# Altium PCB LFO PCB 2.PcbDoc
Units mm, origin at the board's own origin, x right, y up, seen from the top; angles counter-clockwise.
Board outline 128.52 x 37.97 mm, 2 copper layers (Top Layer, Bottom Layer); 37 components, 26 nets, 117 pads, 28 vias.
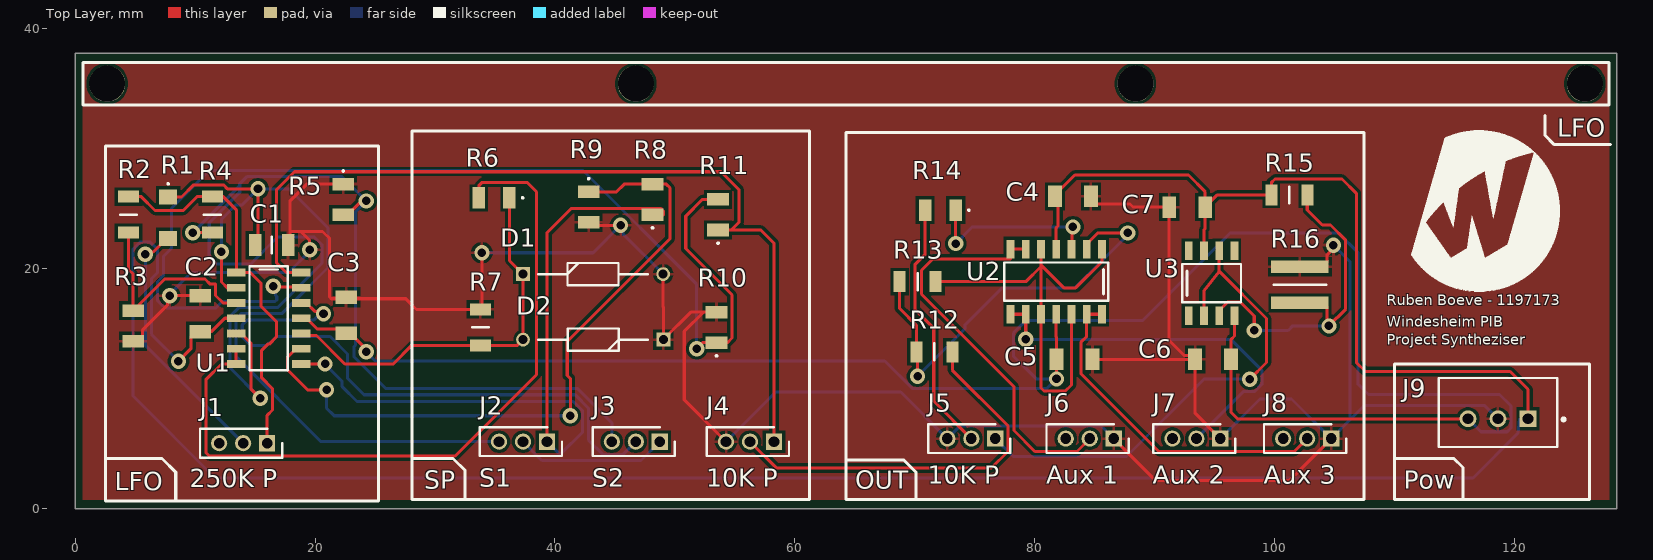
[diagram p0: Top Layer view]
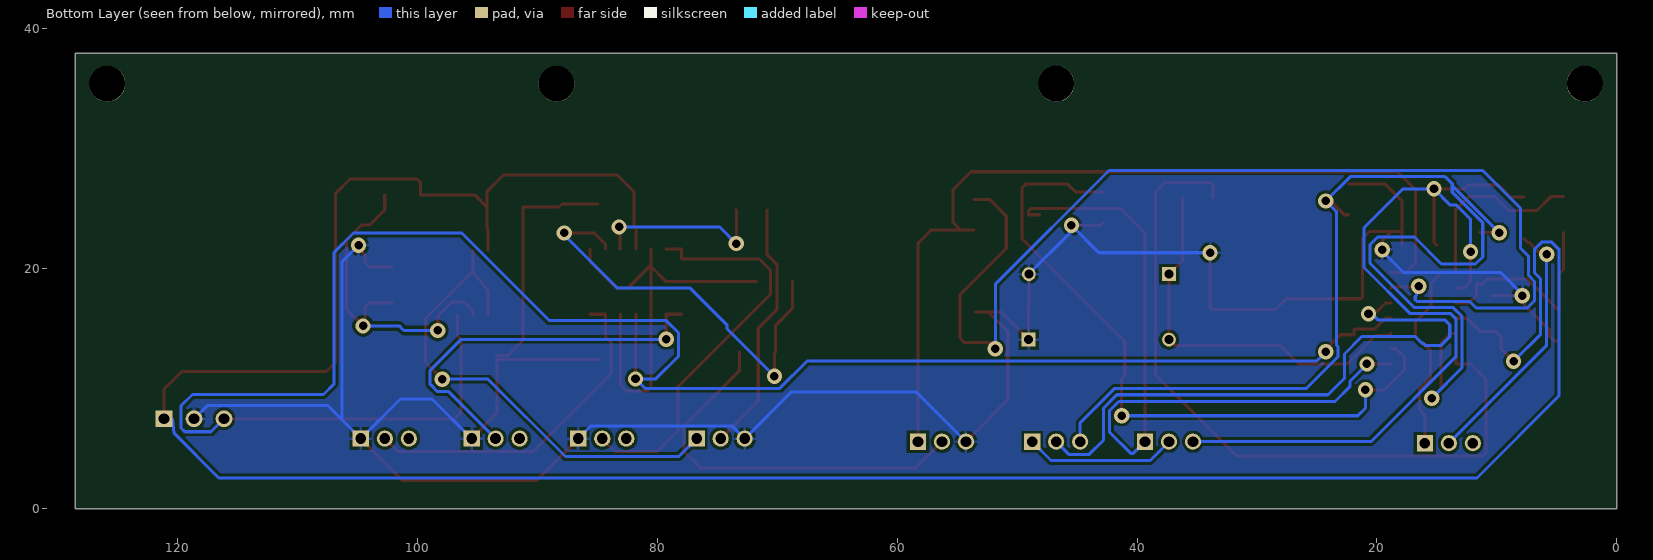
[diagram p1: Bottom Layer view, seen from below]

## Layer stack, top to bottom
Top Solder: solder mask 0.0102, Solder Resist, Dk 3.5
Top Layer: signal copper 0.0356
Dielectric 1: dielectric 0.32, FR-4, Dk 4.8
Bottom Layer: signal copper 0.0356
Bottom Solder: solder mask 0.0102, Solder Resist, Dk 3.5

## Board outline
0,0 0,37.973 128.524,37.973 128.524,0

## Design rules (kind name [scope] priority, off if disabled: settings)
Clearance "polygon to board clearance" [InPolygon vs OnLayer('Mechanical 1')] p1: gap=0.305 ignorepadtopadclearanceinfootprint=TRUE
Clearance Clearance_1 [All] p2: gap=0.254 ignorepadtopadclearanceinfootprint=TRUE
PolygonConnect [All] p1: connectstyle=Relief reliefconductorwidth=0.254 reliefentries=4 polygonreliefangle="90 Angle" airgapwidth=0.254
RoutingVias [All] p1: holewidth=0.711 width=1.27 viastyle="Through Hole" minholewidth=0.711 minwidth=1.27 maxholewidth=0.711 maxwidth=1.27
SolderMaskExpansion [All] p1: expansion=0.102 istentingtop=FALSE
SupplyNets "Schematic Supply Nets_3" [InNet('VCC')] p1: voltage=0.000
SupplyNets "Schematic Supply Nets_2" [InNet('-VCC')] p2: voltage=0.000
SupplyNets "Schematic Supply Nets_1" [InNet('GND')] p3: voltage=0.000
SupplyNets "Schematic Supply Nets" [InNet('+1.5V')] p4: voltage=0.000
Width [All] p1: maxlimit=0.254 minlimit=0.254 preferedwidth=0.254
30 further rules are at their usual default settings.

## Components (designator, comment, footprint, x,y, rotation, side; value= is the part's Value field where it differs from the comment)
C1 "4.7uF" CAPC3216X180N 16.383,21.971 r180 top
C2 "0.1uF" C1206 10.414,16.256 r90 top
C3 "0.1uF" C1206 22.606,16.129 r90 top
C4 "0.1uF" C1206 83.185,26.035 r0 top
C5 "0.1uF" C1206 83.312,12.446 r0 top
C6 "0.1uF" C1206 94.869,12.446 r180 top
C7 "0.1uF" C1206 92.71,25.146 r0 top
D1 "1N4148,133" DIOAD1165W56L425D185 37.321,19.558 r0 top
D2 "1N4148,133" DIOAD1165W56L425D185 49.038,14.097 r180 top
J1 "250K P" SHDR3W50P0X200_1X3_650X240X440P 16.002,5.461 r180 top
J2 "S1" SHDR3W50P0X200_1X3_650X240X440P 39.338,5.588 r180 top
J3 "S2" SHDR3W50P0X200_1X3_650X240X440P 48.736,5.588 r180 top
J4 "10K P" SHDR3W50P0X200_1X3_650X240X440P 58.261,5.588 r180 top
J5 "10K P" SHDR3W50P0X200_1X3_650X240X440P 76.708,5.842 r180 top
J6 "Aux 1" SHDR3W50P0X200_1X3_650X240X440P 86.582,5.842 r180 top
J7 "Aux 2" SHDR3W50P0X200_1X3_650X240X440P 95.472,5.842 r180 top
J8 "Aux 3" SHDR3W50P0X200_1X3_650X240X440P 104.711,5.842 r180 top
J9 "B3B-XH-A(LF)(SN)" FP-B3B-XH-A_LF_SN-MFG 118.618,8.018 r180 top
R1 "1.1K" ERJS08_U08_(1206) 7.747,24.257 r270 top
R2 "10K" RESC3116X65N 4.445,24.511 r90 top
R3 "1K" RCC1206_e3 4.826,15.24 r90 top
R4 "10K" RESC3116X65N 11.43,24.511 r270 top
R5 "1K" RCC1206_e3 22.352,25.781 r270 top
R6 "1K" RCC1206_e3 34.925,25.908 r180 top
R7 "10K" RESC3116X65N 33.782,15.113 r270 top
R8 "1K" RCC1206_e3 48.133,25.781 r90 top
R9 "1K" RCC1206_e3 42.799,25.146 r270 top
R10 "1K" RCC1206_e3 53.467,15.113 r90 top
R11 "1K" RCC1206_e3 53.594,24.511 r90 top
R12 "10K" RESC3116X65N 71.628,13.081 r180 top
R13 "10K" RESC3116X65N 70.231,18.923 r0 top
R14 "1K" RCC1206_e3 72.136,24.892 r180 top
R15 "10K" RESC3116X65N 101.219,26.162 r180 top
R16 "1.5K" RESC3246X60N 102.108,18.669 r270 top
U1 "LM324N" SOIC127P600X175-14N 16.129,15.875 r0 top
U2 "LM324N" SOIC127P600X175-14N 81.788,18.923 r270 top
U3 "UA741CD" SOIC127P600X175-8N 94.742,18.796 r90 top

## Footprints (in the part's own frame and the unit in brackets; to place one, negate y for a bottom-side part, rotate by r counter-clockwise, add the part's x,y. Pads: shape width x height; smd on the part's side, far side on the other; paste and mask are expansions set on the pad)
C1206 [mm]
  rect 1.15x1.8 smd: 1(-1.5,0) 2(1.5,0)
  body extent -1.7,-0.9 1.7,0.9, height 1.75
CAPC3216X180N [mm]
  rect 1.07x1.82 smd: 1(-1.38,0) 2(1.38,0)
  silkscreen extent 0,-0.7 0,0.7, body extent -1.6,-0.8 1.6,0.8, height 1.8
DIOAD1165W56L425D185 [mm]
  rect 1.15x1.15 hole 0.75: 1(0,0)
  round 1.15 hole 0.75: 2(11.7,0)
  silkscreen extent 1.29,-0.93 10.43,0.93, body extent 0.96,1.69 2.67,3.39, height 32.04
ERJS08_U08_(1206) [mm]
  rect 1.25x1.5 smd: 1(-1.725,0) 2(1.725,0)
  silkscreen extent -2.87,-0.05 -2.78,0.05, body extent -1.6,-0.8 1.6,0.8, height 0.6
FP-B3B-XH-A_LF_SN-MFG [mm]
  rect 1.4x1.4 hole 0.9 paste-2539.97 mask+0: 1(-2.5,0.525)
  round 1.4 hole 0.9 paste-2539.97 mask+0: 2(0,0.525) 3(2.5,0.525)
  silkscreen extent -5.6,-2.88 4.95,2.87, body extent -5.05,-2.98 5.05,2.98, height 0.25
RCC1206_e3 [mm]
  rect 1.05x1.8 smd: 1(-1.275,0) 2(1.275,0)
  body extent -1.6,-0.8 1.6,0.8, height 0.55
RESC3116X65N [mm]
  rect 1x1.75 smd: 1(-1.5,0) 2(1.5,0)
  silkscreen extent 0,-0.7 0,0.7, body extent -1.55,-0.8 1.55,0.8, height 0.65
RESC3246X60N [mm]
  rect 1.05x4.8 smd: 1(-1.5,0) 2(1.5,0)
  silkscreen extent 0,-2.2 0,2.2, body extent -1.58,-2.3 1.58,2.3, height 0.6
SHDR3W50P0X200_1X3_650X240X440P [mm]
  rect 1.35x1.35 hole 0.9: 1(0,0)
  round 1.35 hole 0.9: 2(2,0) 3(4,0)
  silkscreen extent -1.25,-1.2 5.6,1.2, body extent -1.25,-1.2 5.25,1.2, height 4.4
SOIC127P600X175-8N [mm]
  rect 1.525x0.65 smd: 1(-2.712,1.905) 2(-2.712,0.635) 3(-2.712,-0.635) 4(-2.712,-1.905) 5(2.712,-1.905) 6(2.712,-0.635) 7(2.712,0.635) 8(2.712,1.905)
  silkscreen extent -1.6,-2.45 1.6,2.45, body extent -3,-2.45 3,2.45, height 1.75
SOIC127P600X175-14N [mm]
  rect 1.525x0.65 smd: 1(-2.712,3.81) 2(-2.712,2.54) 3(-2.712,1.27) 4(-2.712,0) 5(-2.712,-1.27) 6(-2.712,-2.54) 7(-2.712,-3.81) 8(2.712,-3.81) 9(2.712,-2.54) 10(2.712,-1.27) 11(2.712,0) 12(2.712,1.27) 13(2.712,2.54) 14(2.712,3.81)
  silkscreen extent -1.6,-4.33 1.6,4.33, body extent -3.01,-4.32 3.01,4.34, height 1.75

## Part data
C1: library part KGM31AR71H475KU, "Capacitor", Manufacturer_Name="Kyocera AVX", Mouser Part Number=581-KGM31AR71H475KU, Arrow Part Number=KGM31AR71H475KU, Arrow Price/Stock=https://www.arrow.com/en/products/kgm31ar71h475ku/avx?region=europe, Datasheet Link=https://eu.mouser.com/datasheet/2/40/KGM_X7R-3223212.pdf, Height=1.8mm, Manufacturer_Part_Number=KGM31AR71H475KU, Mouser Price/Stock=https://www.mouser.co.uk/ProductDetail/KYOCERA-AVX/KGM31AR71H475KU?qs=9vOqFld9vZWqrEB01UnVcA%3D%3D
C2 C3 C4 C5 C6 C7: library part C1206F104M4RACTU, "Capacitor", Manufacturer_Name=KEMET, Mouser Part Number=80-C1206F104M4R, Datasheet Link=https://content.kemet.com/datasheets/KEM_C1012_X7R_OPENMODE_SMD.pdf, Manufacturer_Part_Number=C1206F104M4RACTU, Mouser Price/Stock=https://www.mouser.com/Search/Refine.aspx?Keyword=80-C1206F104M4R
D1 D2: "Diode", Manufacturer_Name=Nexperia, Mouser Part Number=771-1N4148,133, Arrow Part Number=1N4148,133, Arrow Price/Stock=https://www.arrow.com/en/products/1n4148133/nxp-semiconductors, Datasheet Link=https://assets.nexperia.com/documents/data-sheet/1N4148_1N4448.pdf, Manufacturer_Part_Number=1N4148,133, Mouser Price/Stock=https://www.mouser.co.uk/ProductDetail/Nexperia/1N4148133?qs=elmhQ6eFu7hy8ApvpFxPZg%3D%3D
J1 J2 J3 J4 J5 J6 J7 J8: library part M22-7130342, "Connector", Manufacturer_Name=Harwin, Mouser Part Number=855-M22-7130342, Datasheet Link=https://cdn.harwin.com/pdfs/M22-713.pdf, Height=4.4mm, Manufacturer_Part_Number=M22-7130342, Mouser Price/Stock=https://www.mouser.co.uk/ProductDetail/Harwin/M22-7130342?qs=ulE8k0yEMYayWQDoDALDQw%3D%3D
J9: library part CMP-17439-000014-3, "CONN HEADER VERT 3POS 2.5MM", Color=Natural, Contact Resistance=20mR, Current Rating=3A, Flammability Rating="UL94 V-0", Housing Color=White, Insulation Resistance=1GR, Max Operating Temperature=85°C, Max Voltage Rating (AC)=250V, Min Operating Temperature=-25°C, Connector Type=Header, Contact Finish - Mating=TIN, Contact Material=Brass, Contact Plating=Tin, Contact Shape=Square, Contact Type="Male Pin", Depth=5.75mm, Fastening Type=Detent, Gender=Male, Housing Material=Polyamide, Insulation Color=Natural, Insulation Material=Nylon, Lead Free="Lead Free", Lead Pitch=2.5mm, Length=9.9mm, Max Current Rating=3A, Max Voltage Rating (DC)=250V, Mount="Through Hole", Number of Contacts=3, Number of Positions=3, Number of Rows=1, Orientation=Straight, Packaging=Bulk, Pitch=2.5mm, REACH SVHC="No SVHC", Series=XH, Termination=Solder, Voltage Rating=250V, Voltage Rating (AC)=250V, Wire/Cable Gauge=22AWG
R1: library part ERJ-S08F1101V, "Resistor", Manufacturer_Name=Panasonic, Datasheet Link=http://industrial.panasonic.com/cdbs/www-data/pdf/RDP0000/AOA0000C334.pdf, Height=0.7mm, Manufacturer_Part_Number=ERJ-S08F1101V
R2 R4 R7 R12 R13 R15: library part RC1206FR-0710KL, "Resistor 1206", Manufacturer_Name=YAGEO, Mouser Part Number=603-RC1206FR-0710KL, Arrow Part Number=RC1206FR-0710KL, Arrow Price/Stock=https://www.arrow.com/en/products/rc1206fr-0710kl/yageo?region=europe, Datasheet Link=https://www.yageo.com/upload/media/product/app/datasheet/rchip/pyu-rc_group_51_rohs_l.pdf, Height=0.65mm, Manufacturer_Part_Number=RC1206FR-0710KL, Mouser Price/Stock=https://www.mouser.co.uk/ProductDetail/YAGEO/RC1206FR-0710KL?qs=%252BhB4WxZmbVEJV82xdVgRUw%3D%3D
R3 R5 R6 R8 R9 R10 R11 R14: library part RCC12061K00FKEA, "Resistor", Manufacturer_Name=Vishay, Mouser Part Number=71-RCC12061K00FKEA, Arrow Part Number=RCC12061K00FKEA, Arrow Price/Stock=https://www.arrow.com/en/products/rcc12061k00fkea/vishay?utm_currency=USD&region=nac, Datasheet Link=https://www.vishay.com/docs/20066/rcce3.pdf, Height=0.6mm, Manufacturer_Part_Number=RCC12061K00FKEA, Mouser Price/Stock=https://www.mouser.co.uk/ProductDetail/Vishay-Dale/RCC12061K00FKEA?qs=IS%252B4QmGtzzoI2b9zl4DztQ%3D%3D
R16: library part CRCW12181K50JNEK, "Resistor", Manufacturer_Name=Vishay, Datasheet Link=https://www.vishay.com/docs/20035/dcrcwe3.pdf, Height=0.6mm, Manufacturer_Part_Number=CRCW12181K50JNEK
U1 U2: "Quad Op-Amp", Manufacturer_Name="Texas Instruments", Manufacturer_Part_Number=LM324M/NOPB, Mouser Part Number=926-LM324M/NOPB, ComponentLink1Description="New link", ComponentLink1URL=http://www.ti.com/lit/ds/symlink/lm324-n.pdf, Height=1.75mm
U3: "Integrated Circuit", Manufacturer_Name="Texas Instruments", Mouser Part Number=595-UA741CD, Arrow Part Number=UA741CD, Arrow Price/Stock=https://www.arrow.com/en/products/ua741cd/texas-instruments?utm_currency=USD&region=nac, Datasheet Link=http://www.ti.com/lit/ds/symlink/ua741.pdf, Height=1.75mm, Manufacturer_Part_Number=UA741CD, Mouser Price/Stock=https://www.mouser.co.uk/ProductDetail/Texas-Instruments/UA741CD?qs=WzgTT80quPFAtpKavrxmtQ%3D%3D

## Free pads (board coordinates)
  round 3 hole 3: 2(2.667,35.433) 3(125.857,35.433) 4(88.392,35.433) 5(46.736,35.433)

## Via types
v1: diameter 1.27, hole 0.711, Top Layer to Bottom Layer, 28 vias

## Nets (pads, with @x,y where several pads share a name; then routed paths per layer and width w, separated by ;. In a path a pad name is that pad's centre, name@x,y a point inside that pad or via, vN(x,y) a via of type N, cw(c..) or ccw(c..) an arc to the next point about the centre after c; other vN are vias at no path point)
+1.5V: J5.1 U3.2 U3.6 | length 41.6
  Top Layer w0.254: U3.2 94.107,18.161 95.377,19.787 ; U3.6 95.377,19.787 ; v1(97.917,10.795) 99.314,12.192 99.314,15.85 95.377,19.787
  Bottom Layer w0.254: J5.1 78.207,4.343 87.655,4.343 94.107,10.795 v1(97.917,10.795)
-VCC: C3.1 C5.1 C6.1 J9.3 U1.11 U2.11 U3.4 | length 169
  Top Layer w0.254: U1.11 19.279,15.875 20.168,14.986 21.833,14.986 21.9,14.919 C3.1@21.9,14.502 ; C3.1@22.154,14.502 23.058,14.502 24.257,13.303 v1(24.257,13.081) ; U2.11 81.788,14.324 81.812,14.3 C5.1 v1(81.812,10.82) ; U3.4 96.647,14.4 96.369,14.122 C6.1 96.369,8.025 96.901,7.493 J9.3
  Bottom Layer w0.254: v1(24.257,13.081) 25.019,12.319 67.488,12.319 69.774,10.033 81.025,10.033 v1(81.812,10.82) 80.112,10.82 78.232,12.7 78.232,14.656 79.248,15.672 88.976,15.672 96.291,22.987 105.323,22.987 106.934,21.376 106.934,10.414 107.823,9.525 118.745,9.525 119.699,8.571 119.699,6.731 119.38,6.412 117.199,6.412 J9.3
GND: C1.1 C2.2 C3.2 C4.2 C5.2 C6.2 C7.1 D1.2 D2.1 J4.3 J5.3 J6.1 J7.1 J8.1 J9.2 R3.1 R5.1 R7.1 R9.2 R10.2 R16.1 | length 243.3
  Top Layer w0.254: R3.1 5.201,13.965 5.599,14.363 5.599,14.871 7.68,16.952 7.68,17.56 v1(7.874,17.755) ; v1@7.874,17.756 C2.2 ; C1.1@17.89,21.971 17.89,23.114 ; v1(19.558,21.59) 19.538,21.61 19.538,22.372 18.796,23.114 ; R5.1 19.304,27.056 17.89,25.642 17.89,23.114 ; v1(33.909,21.336) 33.909,16.74 R7.1 28.448,16.613 27.559,17.502 21.358,17.502 21.209,17.651 21.209,22.53 20.625,23.114 18.796,23.114 ; R9.2 43.048,23.622 v1(45.466,23.622) ; D1.2 49.021,16.832 49.038,16.815 D2.1 51.329,16.388 52.38,16.388 ; R10.2 52.38,16.388 ; J4.3 50.775,9.074 50.775,14.783 52.38,16.388 ; C5.2 C6.2 ; C4.2@84.939,25.4 87.935,25.4 88.189,25.146 C7.1 91.21,14.022 92.456,12.776 93.369,12.776 C6.2 ; J6.1 90.087,2.337 101.206,2.337 J8.1 ; J7.1 93.369,7.945 C6.2 ; R16.1 103.983,20.169 104.381,20.567 104.381,21.175 104.902,21.696 v1(104.902,21.971) ; 17.89,23.114 18.796,23.114
  Bottom Layer w0.254: v1(7.874,17.755) 7.874,17.882 9.685,19.692 17.787,19.692 19.558,21.463 v1(19.558,21.59) ; v1(33.909,21.336) 43.18,21.336 v1(45.466,23.622) 45.66,23.428 45.66,22.919 D1.2 ; J4.3 58.401,9.728 68.822,9.728 J5.3 73.775,6.909 85.515,6.909 J6.1 ; J7.1 98.774,9.144 101.409,9.144 J8.1 106.274,7.405 ; v1(104.902,21.971) 106.274,20.599 106.274,7.405 ; J9.2 117.526,8.585 107.454,8.585 106.274,7.405
NetD1_1: D1.1 D2.2 R6.1 R7.2 U1.10 | length 32.7
  Top Layer w0.254: U1.10 19.014,14.432 20.112,14.432 22.479,12.065 26.519,12.065 28.067,13.613 R7.2 36.854,13.613 D2.2 37.338,16.815 37.321,16.832 D1.1 36.2,20.679 R6.1
NetJ1_1: J1.1 R2.2 R4.1 U1.1 | length 33.1
  Top Layer w0.254: R2.2 5.51,26.011 6.655,24.867 9.016,24.867 10.16,26.011 R4.1 12.343,26.011 13.437,24.917 U1.1@13.437,19.685 ; U1.1 U1.1@13.437,19.685 ; J1.1 16.002,7.781 16.452,8.231 16.452,10.004 15.543,10.913 15.543,13.199 16.06,13.716 16.169,13.716 16.764,14.311 16.764,15.601 15.494,16.871 15.494,18.796 14.605,19.685 U1.1@13.437,19.685
NetJ1_2: J1.2 R1.2 | length 21.6
  Top Layer w0.254: v1(5.842,21.209) 6.036,21.403 6.493,21.403 7.271,22.181 7.396,22.181 R1.2
  Bottom Layer w0.254: v1(5.842,21.209) 5.842,13.621 J1.2
NetJ2_2: J2.2 J3.1 | length 12.7
  Bottom Layer w0.254: J2.2 38.902,4.024 47.172,4.024 J3.1
NetJ4_1: J4.1 R11.1 U1.14 | length 73.6
  Top Layer w0.254: U1.14 17.602,19.685 16.764,20.523 16.764,26.568 18.288,28.092 53.848,28.092 55.347,26.594 55.347,23.876 54.707,23.236 ; R11.1 54.707,23.236 ; J4.1 58.261,22.13 57.155,23.236 54.707,23.236
NetJ5_2: J5.2 R14.2 | length 21.4
  Top Layer w0.254: R14.2 70.861,21.206 70.002,20.347 70.002,16.619 71.577,15.045 71.577,8.973 J5.2
NetJ6_2: J6.2 U2.6 U2.7 | length 33.9
  Top Layer w0.254: U2.6 U2.7 77.978,20.828 71.515,20.828 70.561,19.874 70.561,17.882 78.272,10.171 78.272,6.513 80.01,4.775 83.515,4.775 J6.2
NetJ7_2: J7.2 U2.8 U2.9 | length 32.6
  Top Layer w0.254: U2.8 U2.9 v1(79.248,14.122)
  Bottom Layer w0.254: v1(79.248,14.122) 96.342,14.122 98.933,11.532 98.933,10.374 98.312,9.754 97.384,9.754 J7.2
NetJ8_2: J8.2 U2.13 U2.14 | length 28.4
  Top Layer w0.254: U2.14 U2.13 84.328,14.351 83.845,13.868 83.845,11.278 90.348,4.775 101.644,4.775 J8.2
NetR2_1: R2.1 R3.2 U1.3 | length 17.7
  Top Layer w0.254: R2.1 4.445,19.939 4.826,19.558 R3.2 7.463,19.152 10.82,19.152 11.252,18.72 11.695,18.72 11.695,17.78 12.33,17.145 U1.3
NetR6_2: R6.2 U1.6 U1.7 | length 62.4
  Top Layer w0.254: U1.6 U1.7 12.192,12.065 10.922,10.795 10.922,4.648 11.176,4.394 31.674,4.394 38.456,11.176 38.456,26.416 37.668,27.203 33.929,27.203 33.65,26.924 R6.2
NetR8_2: R8.2 R9.1 U1.9 | length 58.4
  Top Layer w0.254: U1.9 18.404,13.335 17.698,12.629 17.698,11.582 19.374,9.906 v1(20.955,9.906) ; v1(41.275,7.747) 41.275,10.856 41.021,11.11 41.021,13.945 49.581,22.504 49.581,26.751 49.276,27.056 R8.2 45.771,27.056 45.136,26.421 R9.1
  Bottom Layer w0.254: v1(20.955,9.906) 20.955,8.382 21.59,7.747 v1(41.275,7.747)
NetR10_1: R10.1 R11.2 U1.13 | length 95
  Top Layer w0.254: v1(16.51,18.542) 16.573,18.479 18.778,18.479 U1.13 ; v1(51.816,13.335) 52.319,13.838 R10.1 54.376,13.838 54.762,14.224 54.762,17.831 50.902,21.692 50.902,24.384 52.304,25.786 R11.2
  Bottom Layer w0.254: v1(16.51,18.542) 16.704,18.348 16.704,17.774 16.804,17.675 16.804,17.421 16.655,17.272 12.257,17.272 11.724,16.739 7.453,16.739 6.858,17.334 6.858,18.941 7.366,19.449 7.366,21.057 8.026,21.717 8.026,25.044 11.176,28.194 42.331,28.194 51.816,18.709 v1(51.816,13.335)
NetR12_2: R12.2 R13.1 U2.2 | length 35.5
  Top Layer w0.254: R13.1 68.731,16.688 70.128,15.291 R12.2 70.231,12.978 v1(70.231,11.049) ; U2.2 84.328,22.073 85.242,22.987 v1(87.757,22.987)
  Bottom Layer w0.254: v1(70.231,11.049) 74.169,14.987 74.169,15.292 77.292,18.415 83.352,18.415 87.757,22.82 v1(87.757,22.987)
NetR14_1: R14.1 U2.3 | length 15.1
  Top Layer w0.254: v1(73.406,22.098) 73.406,24.887 R14.1 ; U2.3 83.121,21.699 83.121,23.431 v1(83.185,23.495)
  Bottom Layer w0.254: v1(73.406,22.098) 74.803,23.495 v1(83.185,23.495)
NetR15_1: R15.1 R16.2 U3.3 | length 29
  Top Layer w0.254: U3.3 95.377,16.521 96.083,17.227 97.13,17.227 98.298,16.059 v1(98.298,14.859) ; R16.2 103.983,17.169 104.381,16.771 104.381,15.38 v1(104.521,15.24) 105.918,16.637 105.918,22.392 104.661,23.649 103.976,23.649 102.719,24.906 R15.1
  Bottom Layer w0.254: v1(98.298,14.859) 101.122,14.859 101.503,15.24 v1(104.521,15.24)
Signal_Output: R13.2 U2.1 U2.5 U2.10 U2.12 | length 37.5
  Top Layer w0.254: R13.2 79.248,18.923 80.518,20.193 ; U2.5 80.518,20.32 80.518,20.193 ; U2.12 83.058,10.312 82.55,9.804 80.772,9.804 80.518,10.058 U2.10 80.518,20.193 ; U2.1 85.598,20.599 83.414,18.415 82.423,18.415 80.581,20.256 80.518,20.193
Signal_Volume_OUT: J4.2 R12.1 | length 33.2
  Top Layer w0.254: J4.2 58.445,3.404 76.392,3.404 77.764,4.775 77.764,6.909 73.128,11.545 R12.1
Sine_Wave_OUT: J2.1 R8.1 U1.8 | length 60.5
  Top Layer w0.254: U1.8 v1(20.828,12.065) ; J2.1 39.338,23.006 41.351,25.019 48.854,25.019 49.048,24.824 49.048,24.506 R8.1
  Bottom Layer w0.254: v1(20.828,12.065) 20.828,12.032 22.259,10.602 22.259,10.177 23.495,8.941 41.518,8.941 42.291,8.168 42.291,6.372 40.528,4.609 40.317,4.609 J2.1
Square_Wave_OUT: J3.3 R4.2 R5.2 U1.5 | length 103.3
  Top Layer w0.254: v1(9.793,23.011) R4.2 ; U1.5 13.854,14.605 14.647,13.812 14.647,10.002 v1(15.436,9.213) ; R5.2 22.727,24.506 23.681,25.46 24.063,25.46 v1(24.257,25.654)
  Bottom Layer w0.254: v1(9.793,23.011) 13.666,26.884 ; v1(15.436,9.213) 12.909,11.739 12.909,16.041 13.633,16.764 16.865,16.764 20.574,20.473 20.574,22.011 19.939,22.646 16.873,22.646 14.623,20.396 11.771,20.396 11.176,20.991 11.176,23.832 13.716,26.372 13.716,26.884 13.716,27.091 14.311,27.686 22.225,27.686 v1(24.257,25.654) 23.368,24.765 23.368,13.629 23.241,13.502 23.241,12.66 25.868,10.033 41.863,10.033 44.736,7.16 J3.3
Triangle_Wave_OUT: C1.2 J2.3 R1.1 U1.2 | length 71.6
  Top Layer w0.254: R1.1 8.856,25.982 9.872,26.998 12.357,26.998 12.685,26.67 v1(15.24,26.67) ; v1(12.192,21.412) 12.192,18.892 12.669,18.415 U1.2 ; C1.2 15.24,22.208 15.24,26.543 v1@15.113,26.67
  Bottom Layer w0.254: v1(12.192,21.412) 12.192,24.13 13.365,25.303 13.873,25.303 v1(15.24,26.67) ; v1@15.303,26.733 15.367,26.67 17.831,26.67 21.082,23.419 21.082,20.113 17.225,16.256 13.843,16.256 13.417,15.83 13.417,12.668 20.498,5.588 J2.3
VCC: C2.1 C4.1 C7.2 J9.1 R15.2 U1.4 U2.4 U3.7 | length 223.5
  Top Layer w0.254: v1(8.608,12.291) 9.641,13.324 9.641,14.308 10.089,14.756 11.354,14.756 12.473,15.875 U1.4 ; U2.4 81.788,23.419 81.939,23.57 81.939,25.4 81.939,26.416 83.336,27.813 92.813,27.813 94.21,26.416 C7.2 ; U3.7 94.107,23.266 94.21,23.369 C7.2 ; J9.1 121.118,9.946 119.634,11.43 107.569,11.43 106.807,12.192 106.807,26.289 105.615,27.481 100.022,27.481 99.719,27.178 R15.2 95.226,26.162 C7.2
  Bottom Layer w0.254: v1(8.608,12.291) 6.35,14.55 6.35,19.152 6.858,19.66 6.858,21.63 6.263,22.225 5.421,22.225 4.826,21.63 4.826,9.398 11.659,2.565 116.549,2.565 120.277,6.293 120.396,7.493 J9.1
Wave_S_OUT: J3.2 U1.12 | length 51.1
  Top Layer w0.254: U1.12 19.279,17.145 19.973,16.45 20.507,16.45 v1(20.701,16.256)
  Bottom Layer w0.254: v1(20.701,16.256) 20.426,16.256 19.918,15.748 14.351,15.748 13.925,15.322 13.925,14.333 14.669,13.589 15.933,13.589 16.138,13.794 16.247,13.794 16.804,14.351 21.26,14.351 22.708,12.903 22.708,10.871 24.079,9.5 41.678,9.5 42.799,8.378 42.799,5.715 43.982,4.532 45.68,4.532 J3.2
pads on no net: J1.3 J6.3 J7.3 J8.3 U3.1 U3.5 U3.8

## Polygon pours and split planes (outlines as drawn)
GND on Bottom Layer "NONET_L-01_P-001" (solid, remove dead copper, pour order 1): 0.635,37.211 0.635,0.635 127.889,0.635 127.889,37.211
GND on Top Layer "NONET_L-01_P-001" (solid, remove dead copper, pour order 0): 0.635,37.211 127.889,37.211 127.889,0.762 0.635,0.762

## Silkscreen, mask and mechanical layers (free items; w line width, h text height)
Top Overlay:
  drawing of 38 lines, arcs and shapes, not listed
  text "LFO" at 123.571,30.988 h1.52
  text "Ruben Boeve - 1197173" at 109.347,16.654 h1.52
  text "Windesheim PIB" at 109.347,14.874 h1.52
  text "Project Syntheziser" at 109.347,13.367 h1.52
  text "SP" at 29.083,1.651 h1.52
  text "OUT" at 65.024,1.651 h1.52
  text "Pow" at 110.744,1.651 h1.52
  text "LFO" at 3.302,1.524 h1.52
Mechanical 1:
  the board outline again, w0.254